# EAGLE board HTVC8038_Display_v12 (EAGLE 7.4.0)
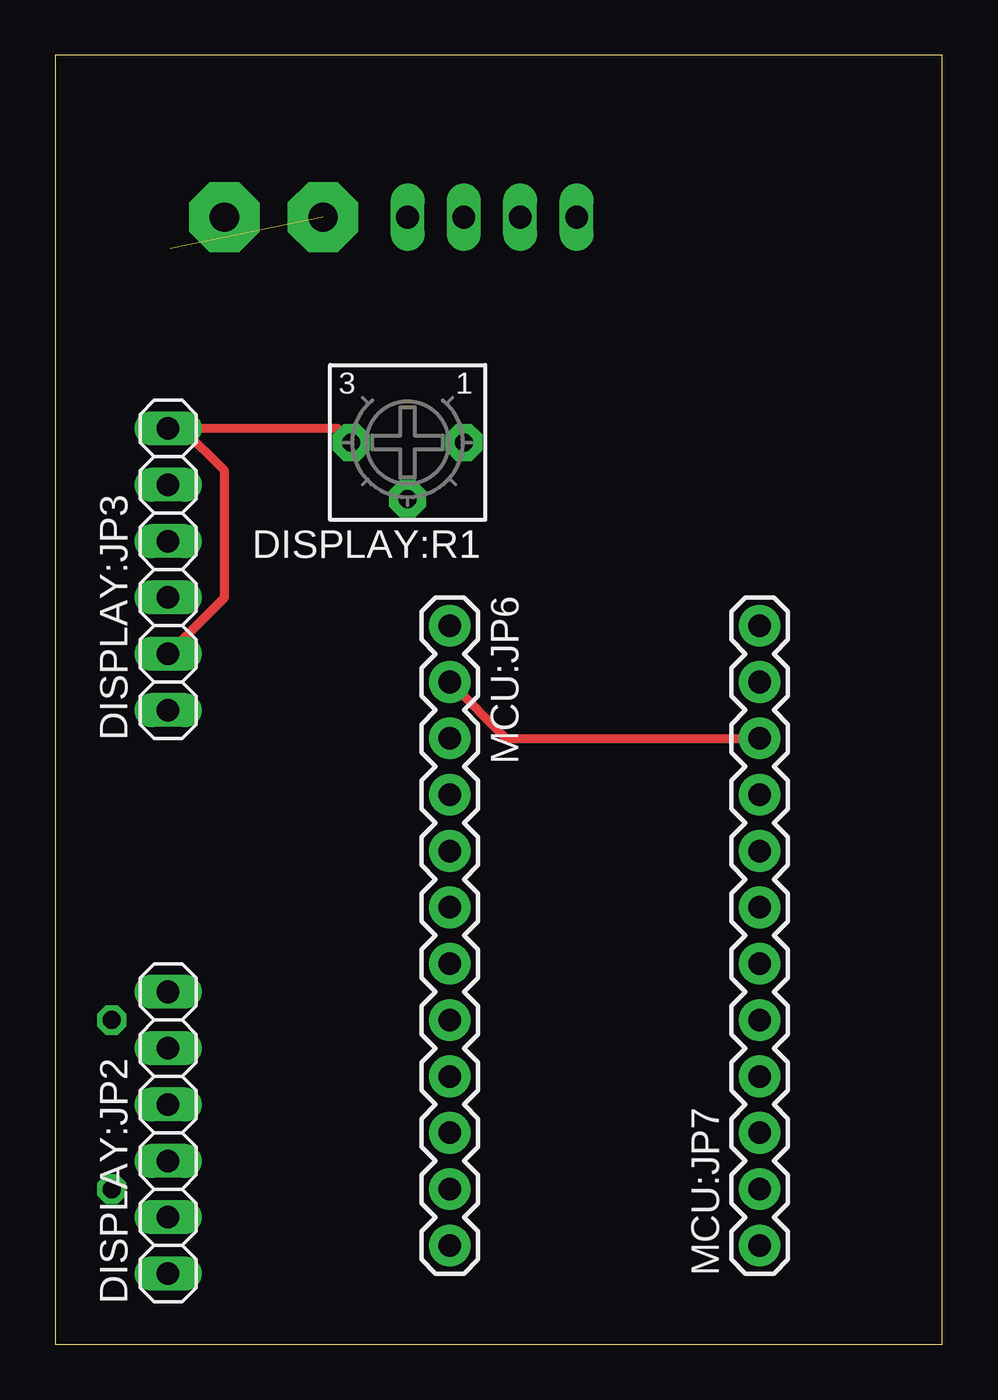
[diagram p0: board, top side]
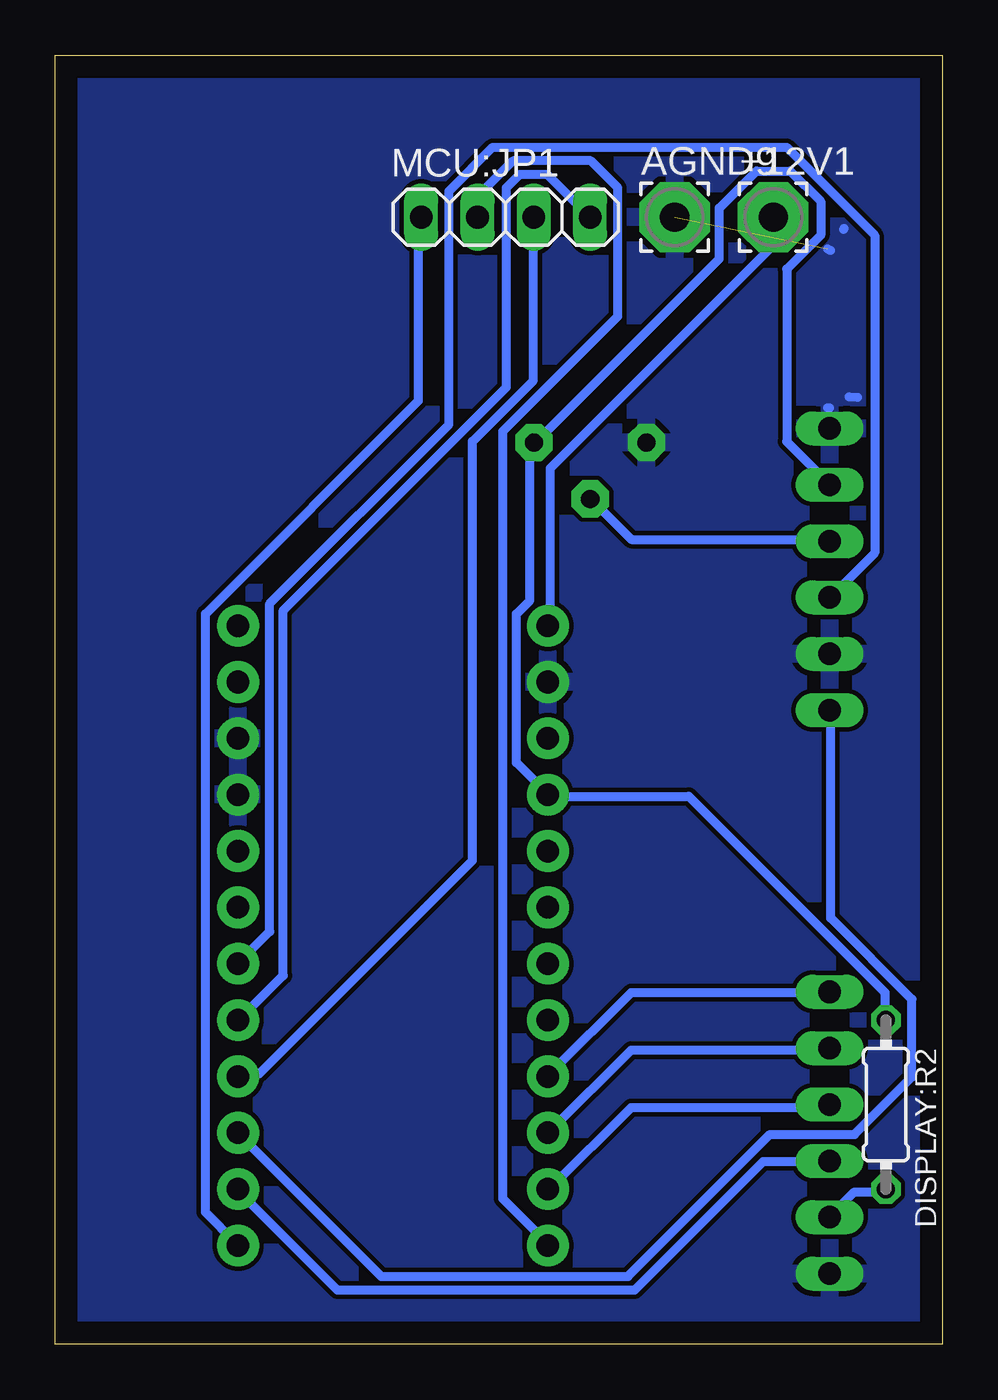
[diagram p1: board, bottom side, seen from below]

Size 39.98 x 58.09 mm. Coordinates in mm from the lower left corner, seen from the top.
Outline: 0,0 39.98,0 39.98,58.09 0,58.09 0,0
Copper layers (1*16): Top 0.035mm / dielectric 1.5mm / Bottom 0.035mm
Design rules "default *": minimum track width 10mil, minimum drill 24mil, track to track 8mil, track to pad 8mil, pad to pad 8mil, via to via 8mil, smd to smd 8mil, copper to edge 40mil, drill to drill 8mil, minimum pad ring 10mil, minimum via ring 8mil, stop-mask expansion 4mil, vias tented up to drill 0mil, thermal gap 10mil
Net classes: 0 default: width 0.406 mm, clearance 0.203 mm; 1 VCC: width 0.406 mm, clearance 0.203 mm; 2 AGND: width 0.406 mm, clearance 0.203 mm; 3 +5V: width 0.406 mm, clearance 0.203 mm

## Footprints (pad centres in the part's own frame; a part is rotated, then mirrored left to right if it is on the bottom)
3,17/1,3 = drill 1.321 pad 3.175 octagon: 1 0,0
1X06 = drill 1.016 long: 1 -6.35,0; 2 -3.81,0; 3 -1.27,0; 4 1.27,0; 5 3.81,0; 6 6.35,0
3362P = drill 0.813 pad 1.676 octagon: 1 -2.54,0; 2 0,2.54; 3 2.54,0
0204/7 = drill 0.813 octagon: 1 -3.81,0; 2 3.81,0
1X04 = drill 1.016 long: 1 -3.81,0; 2 -1.27,0; 3 1.27,0; 4 3.81,0
1X12 = drill 1.016 pad 1.88: 1 0,0; 2 2.54,0; 3 5.08,0; 4 7.62,0; 5 10.16,0; 6 12.7,0; 7 15.24,0; 8 17.78,0; 9 20.32,0; 10 22.86,0; 11 25.4,0; 12 27.94,0

## Placement (x,y rotation side)
+12V1  [3,17/1,3]  7.62,50.8 0 bottom
AGND9  [3,17/1,3]  12.06,50.8 0 bottom
DISPLAY:JP2  [1X06]  5.08,9.53 90 top
DISPLAY:JP3  [1X06]  5.08,34.92 90 top
DISPLAY:R1  10k  [3362P]  15.88,40.64 180 top
DISPLAY:R2  470R  [0204/7]  2.54,10.79 270 bottom
MCU:JP1  [1X04]  19.68,50.8 0 bottom
MCU:JP6  [1X12]  17.78,32.38 270 top
MCU:JP7  [1X12]  31.75,4.45 90 top

## Library data of the parts
+12V1 AGND9 = wirepad
DISPLAY:JP2 DISPLAY:JP3 MCU:JP1 = pinhead
DISPLAY:R1 = nervus
DISPLAY:R2 = rcl
MCU:JP6 MCU:JP7 = SparkFun

## Nets
+5V [+5V]: DISPLAY:JP3.5 DISPLAY:R1.1 DISPLAY:R2.1 MCU:JP6.4
A0: MCU:JP6.8
A1: MCU:JP6.7
A2: MCU:JP6.6
A3: MCU:JP6.5
AGND [AGND]: AGND9.1 DISPLAY:JP2.1 DISPLAY:JP3.2 DISPLAY:JP3.6 DISPLAY:R1.3 MCU:JP6.2 MCU:JP7.9 MCU:JP7.10
DISPLAY:N$1: DISPLAY:JP3.4 DISPLAY:R1.2
DISPLAY:N$2: DISPLAY:JP2.2 DISPLAY:R2.2
MCU:RESET: MCU:JP6.3
N$1: DISPLAY:JP3.3 MCU:JP7.6
N$2: DISPLAY:JP3.1 MCU:JP7.3
N$3: DISPLAY:JP2.6 MCU:JP6.9
N$4: DISPLAY:JP2.5 MCU:JP6.10
N$5: DISPLAY:JP2.4 MCU:JP6.11
N$6: DISPLAY:JP2.3 MCU:JP7.2
N$21: MCU:JP1.4 MCU:JP7.5
N$22: MCU:JP1.3 MCU:JP7.4
N$23: MCU:JP1.1 MCU:JP7.1
N$37: MCU:JP1.2 MCU:JP6.12
TACH0: MCU:JP7.7
TACH1: MCU:JP7.8
TACH2: MCU:JP7.12
TACH3: MCU:JP7.11
VCC [VCC]: +12V1.1 MCU:JP6.1

## Tracks (layer width: path | path; a pad name or v marks a point on that pad's centre or on a via)
+5V
  Bottom 0.406: DISPLAY:JP3.5 5.18,38.86 7.01,40.69 7.01,48.46 5.49,49.99 5.49,51.51 6.86,52.88 8.38,52.88 10.06,51.21 10.06,48.92 18.29,40.69 DISPLAY:R1.1 18.59,40.54 18.59,33.53 19.2,32.92 19.2,26.21 17.83,24.84 MCU:JP6.4 17.68,24.69 11.43,24.69 2.59,15.85 2.59,14.63 DISPLAY:R2.1
AGND  (1 unrouted)
  Top 0.406: DISPLAY:R1.3 12.7,41.27 DISPLAY:JP3.6 5.71,41.27 7.62,39.37 7.62,33.66 DISPLAY:JP3.2 | MCU:JP6.2 20.32,27.3 MCU:JP7.10
  Bottom 0.406: 31.75,25.3 31.85,25.3 MCU:JP7.9 | DISPLAY:JP3.6 5.18,41.3 5.08,41.3 | 5.18,49.38 5.03,49.3 | 5.18,42.22 5.08,42.22 | DISPLAY:JP3.6 4.72,41.15 DISPLAY:JP3.6 | 3.81,42.67 4.21,42.7 | DISPLAY:JP3.6 4.72,41.6 5.08,41.6 | 4.42,50.29 4.46,50.25
  pour Bottom: 1.27,57.15 1.27,1.27 39.37,1.27 39.37,57.15
DISPLAY:N$1
  Bottom 0.406: DISPLAY:JP3.4 5.18,36.27 14.02,36.27 15.85,38.1 DISPLAY:R1.2
DISPLAY:N$2
  Bottom 0.406: DISPLAY:R2.2 2.59,6.86 3.96,6.86 5.03,5.79 DISPLAY:JP2.2
N$1
  Bottom 0.406: DISPLAY:JP3.3 5.03,33.68 3.05,35.66 3.05,49.99 7.01,53.95 20.27,53.95 22.25,51.97 22.25,41.45 30.33,33.38 30.33,18.59 31.7,17.22 MCU:JP7.6
N$2
  Bottom 0.406: DISPLAY:JP3.1 5.03,28.5 5.03,19.2 1.37,15.54 1.37,12.04 3.96,9.45 7.77,9.45 14.17,3.05 25.3,3.05 31.7,9.45 MCU:JP7.3
N$3
  Bottom 0.406: DISPLAY:JP2.6 5.18,15.85 14.02,15.85 17.68,12.19 MCU:JP6.9
N$4
  Bottom 0.406: DISPLAY:JP2.5 5.18,13.26 14.02,13.26 17.68,9.6 MCU:JP6.10
N$5
  Bottom 0.406: DISPLAY:JP2.4 5.18,10.67 14.02,10.67 17.68,7.01 MCU:JP6.11
N$6
  Bottom 0.406: DISPLAY:JP2.3 5.18,8.23 8.08,8.23 13.87,2.44 27.28,2.44 31.7,6.86 MCU:JP7.2
N$21
  Bottom 0.406: MCU:JP1.4 16,50.9 17.83,52.73 19.05,52.73 19.66,52.12 19.66,43.13 29.72,33.07 29.72,16.61 31.7,14.63 MCU:JP7.5
N$22
  Bottom 0.406: MCU:JP1.3 18.44,50.75 18.44,43.43 21.18,40.69 21.18,21.79 30.79,12.19 31.7,12.19 MCU:JP7.4
N$23
  Bottom 0.406: MCU:JP1.1 23.62,50.75 23.62,42.52 33.22,32.92 33.22,5.94 31.85,4.57 MCU:JP7.1
N$37
  Bottom 0.406: MCU:JP1.2 20.88,50.9 20.88,51.82 19.36,53.34 15.85,53.34 14.63,52.12 14.63,46.33 19.81,41.15 19.81,6.55 17.83,4.57 MCU:JP6.12
VCC
  Bottom 0.406: +12V1.1 7.62,49.53 17.68,39.47 17.68,32.46 MCU:JP6.1